# Altium PCB Instrumental Amplifier-2.PcbDoc
Units mm, origin at the board's own origin, x right, y up, seen from the top; angles counter-clockwise.
Board outline 152.4 x 101.6 mm, 2 copper layers (Top Layer, Bottom Layer); 11 components, 11 nets, 34 pads, 13 vias.
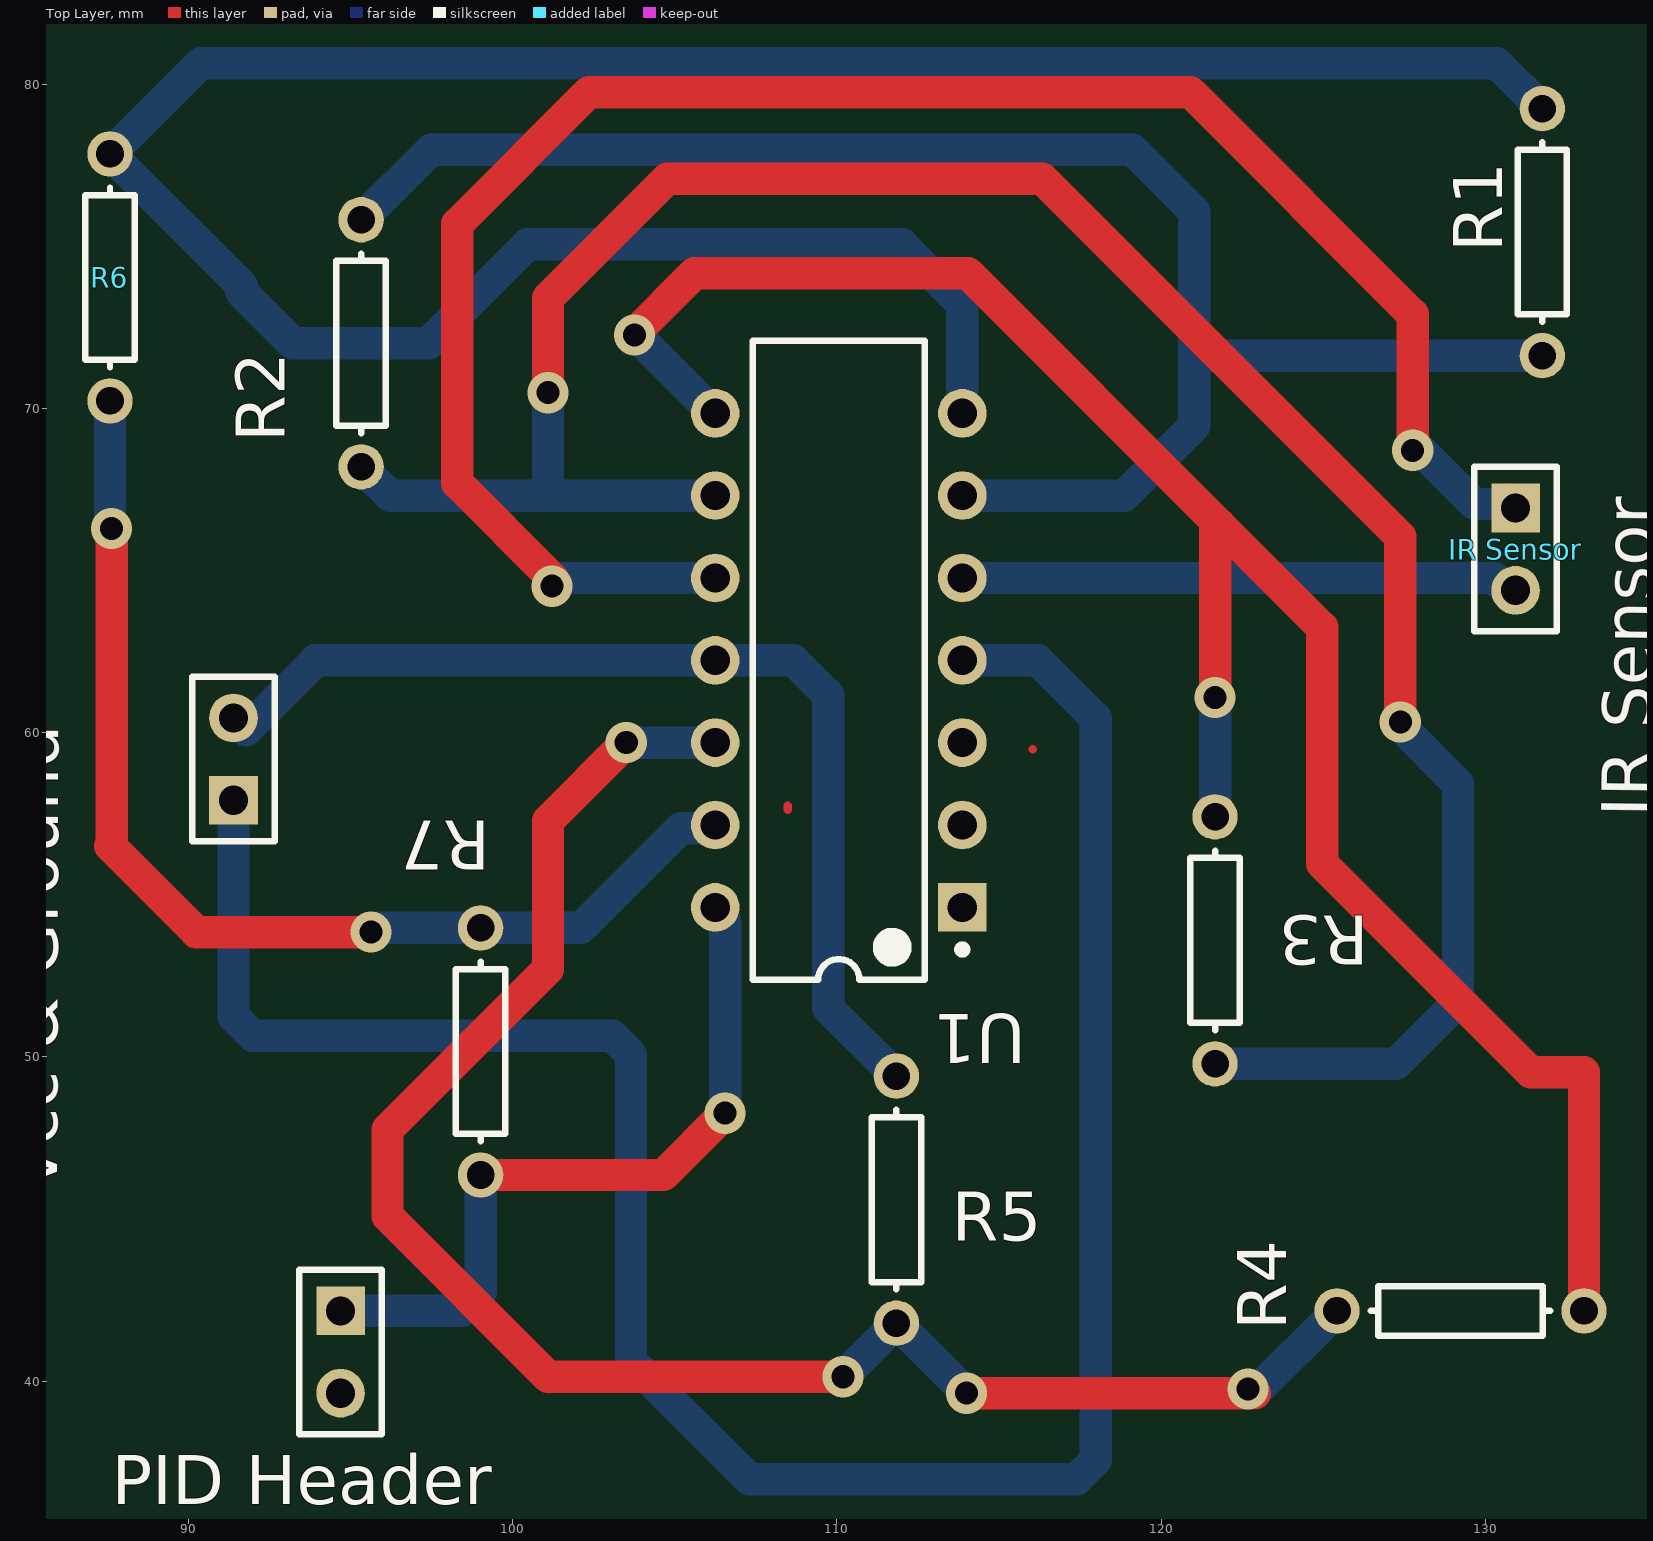
[diagram p0: Top Layer view]
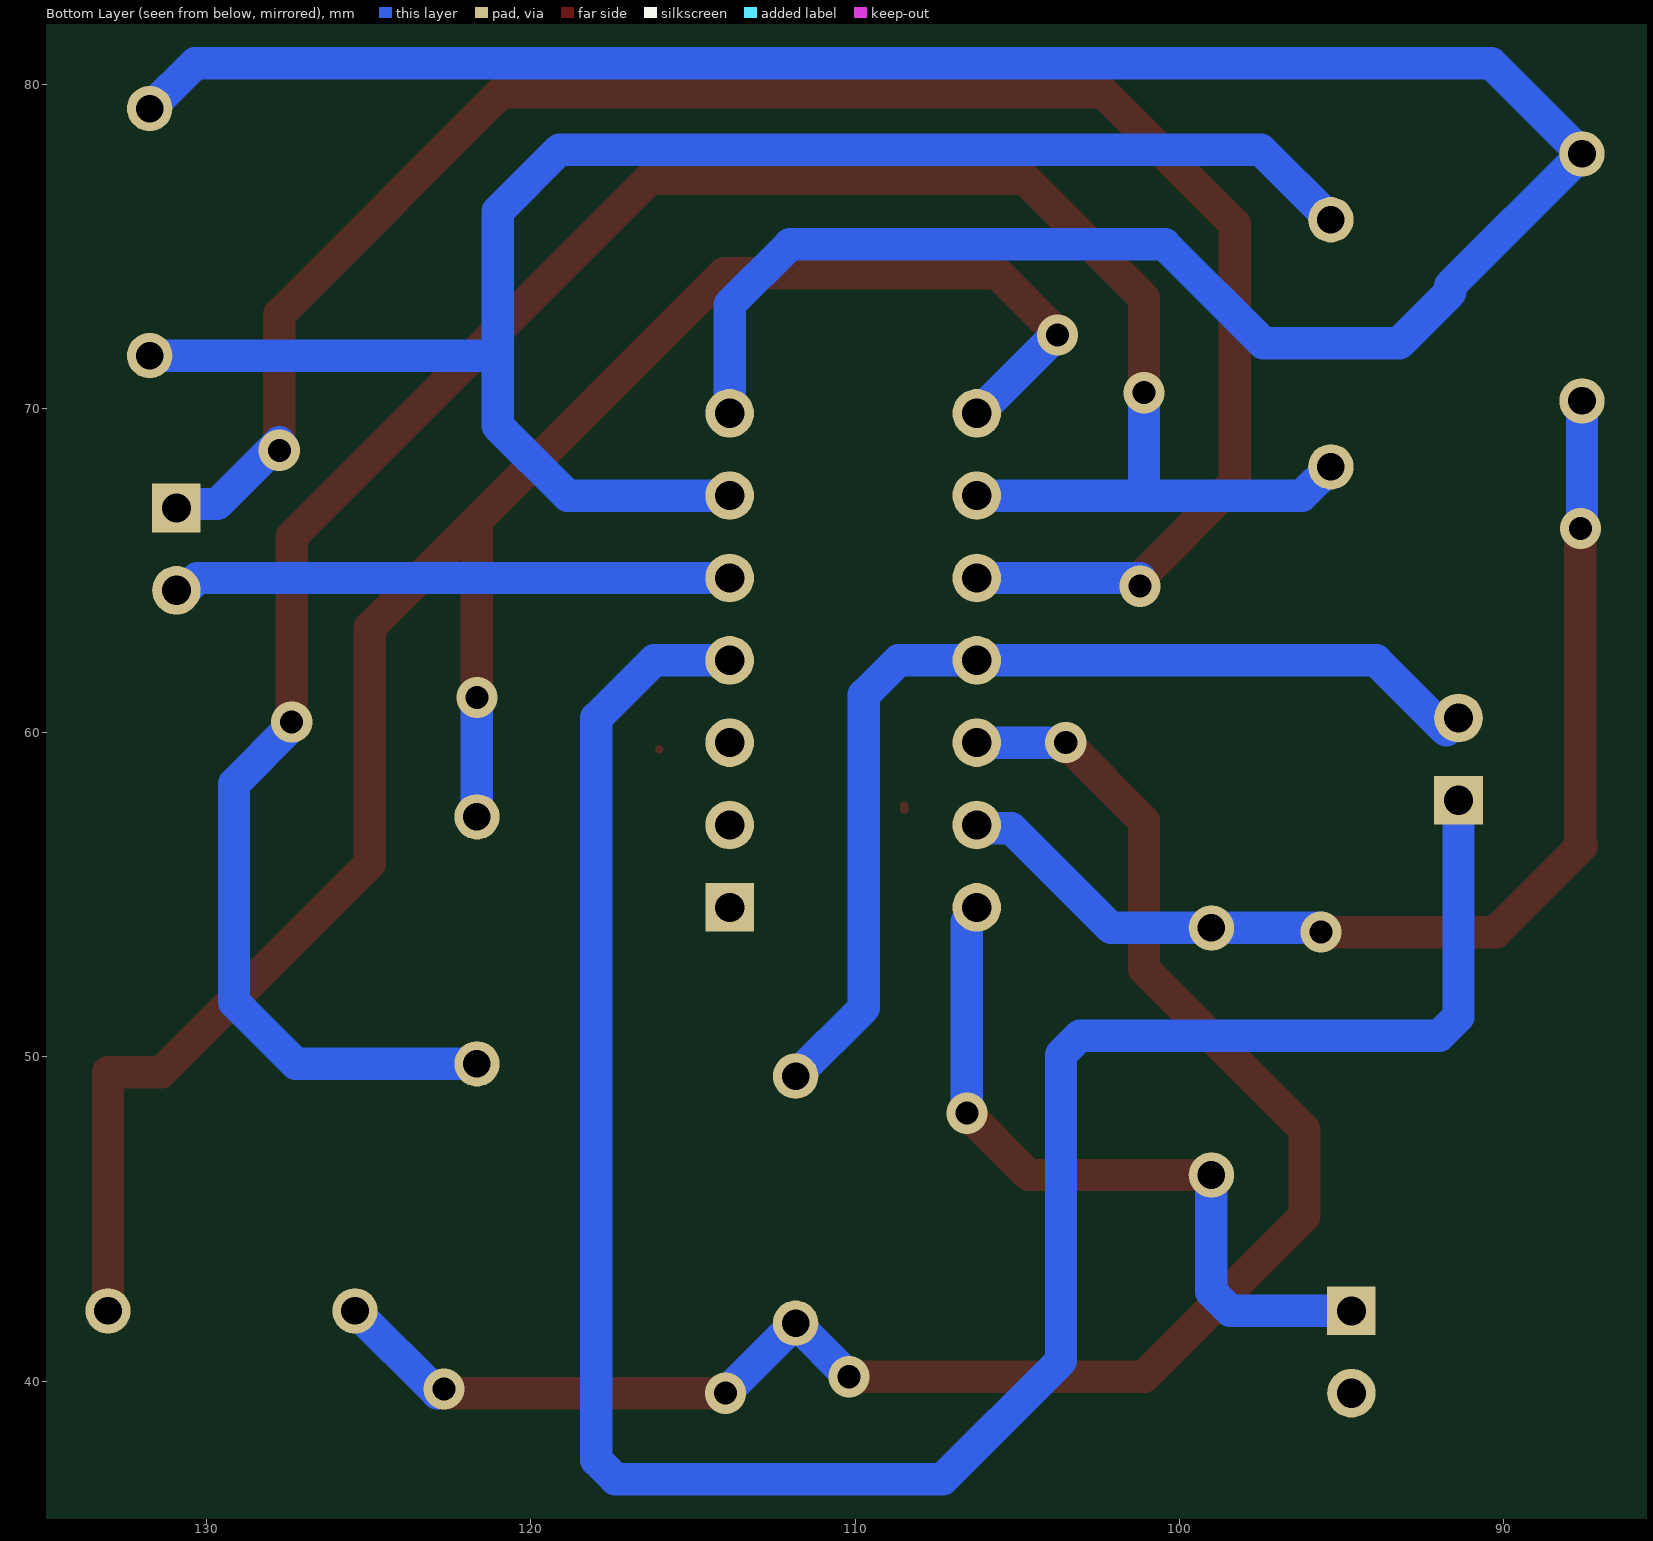
[diagram p1: Bottom Layer view, seen from below]

## Layer stack, top to bottom
Top Solder: solder mask 0.0102, Solder Resist, Dk 3.5
Top Layer: signal copper 0.0356
Dielectric 1: dielectric 0.32, FR-4, Dk 4.8
Bottom Layer: signal copper 0.0356
Bottom Solder: solder mask 0.0102, Solder Resist, Dk 3.5

## Board outline
25.4,25.4 177.8,25.4 177.8,127 25.4,127

## Design rules (kind name [scope] priority, off if disabled: settings)
Clearance [All] p1: gap=0.254 ignorepadtopadclearanceinfootprint=FALSE except(0: Arc-Hole Track-Hole SMDPad-Hole THPad-Hole Via-Hole Fill-Hole Poly-Hole Region-Hole Text-Hole)
PolygonConnect [All] p1: connectstyle=Relief reliefconductorwidth=0.254 reliefentries=4 polygonreliefangle="90 Angle" airgapwidth=0.254
RoomDefinition "Instrumental amplifier" [InComponentClass('Instrumental amplifier')] p1: confinementstyle=ConfineIn formatcopy=TRUE lockcomponents=FALSE outline 80.186,34.925 136.193,34.925 136.193,82.227 80.186,82.227
RoutingVias [All] p1: holewidth=0.711 width=1.27 viastyle="Through Hole" minholewidth=0.711 minwidth=1.27 maxholewidth=0.711 maxwidth=1.27
SolderMaskExpansion [All] p1: expansion=0.102 istentingtop=FALSE
Width [All] p1: maxlimit=1.5 minlimit=0.5 preferedwidth=1
30 further rules are at their usual default settings.

## Components (designator, comment, footprint, x,y, rotation, side; value= is the part's Value field where it differs from the comment)
"IR Sensor" "Header 2" HDR1X2 130.937,66.929 r270 top (schematic designator "IR Sensors")
"PID Header" "Header 2" HDR1X2 94.693,42.164 r270 top
R1 "Res1" AXIAL-0.3 131.759,75.438 r90 top value=1K
R2 "Res1" AXIAL-0.3 95.328,72.009 r90 top value=1K
R3 "Res1" AXIAL-0.3 121.666,53.594 r270 top value=1K
R4 "Res1" AXIAL-0.3 129.237,42.164 r180 top value=1K
R5 "Res1" AXIAL-0.3 111.838,45.593 r90 top value=1K
R6 "Res1" AXIAL-0.3 87.581,74.041 r270 top value=1K
R7 "Res1" AXIAL-0.3 99.011,50.165 r270 top value=1K
U1 "LM324N" N0014A 110.06,62.23 r180 top
"Vcc & Ground" "Header 2" HDR1X2 91.391,57.912 r90 top

## Footprints (in the part's own frame and the unit in brackets; to place one, negate y for a bottom-side part, rotate by r counter-clockwise, add the part's x,y. Pads: shape width x height; smd on the part's side, far side on the other; paste and mask are expansions set on the pad)
AXIAL-0.3 [mm] "Axial Device, Thru-Hole; 2 Leads; 0.3 in Pin Spacing"
  round 1.4 hole 0.85: 1(-3.81,0) 2(3.81,0)
  silkscreen extent -2.77,-0.76 2.77,0.76
HDR1X2 [mm] "Connector; Header; 2 Position"
  rect 1.5x1.5 hole 0.9: 1(0,0)
  round 1.5 hole 0.9: 2(2.54,0)
  silkscreen extent -1.27,-1.27 3.81,1.27
N0014A [mm] "DIP, 14-Leads, Body 19.7x6.6mm, Pitch 2.54mm"
  rect 1.5x1.5 hole 0.9: 1(-3.81,7.62)
  round 1.5 hole 0.9: 2(-3.81,5.08) 3(-3.81,2.54) 4(-3.81,0) 5(-3.81,-2.54) 6(-3.81,-5.08) 7(-3.81,-7.62) 8(3.81,-7.62) 9(3.81,-5.08) 10(3.81,-2.54) 11(3.81,0) 12(3.81,2.54) 13(3.81,5.08) 14(3.81,7.62)
  silkscreen extent -3.94,-9.85 2.65,9.85, body extent -3.95,-9.85 3.95,9.85, height 5.08

## Part data
"IR Sensor" "PID Header" "Vcc & Ground": "Header, 2-Pin", LatestRevisionDate=17-Jul-2002, LatestRevisionNote="Re-released for DXP Platform.", Publisher="Altium Limited"
R1 R2 R3 R4 R5 R6 R7: "Resistor", LatestRevisionDate=17-Jul-2002, LatestRevisionNote="Re-released for DXP Platform.", PackageDescription="Axial Device, Thru-Hole; 2 Leads; 0.3 in Pin Spacing", PackageReference=AXIAL-0.3, Published=8-Jun-2000, Publisher="Altium Limited"
U1: library part CMP-0055-00082-3, "Low Power Quad Operational Amplifier, 14-pin MDIP", Manufacturer="Texas Instruments", Package Reference=N0014A, PackageTopMarking=NSUZXYYTTE#*LM324N, PowerWise=N, Code_JEDEC=MS-001-AA, ComponentLink1Description="Datasheet URL", ComponentLink1URL=http://www.ti.com/general/docs/lit/getliterature.tsp?genericPartNumber=LM324&fileType=pdf, CompType=Amplifiers, PackageDescription="MDIP, .750 x .250 x.130in, 14 Lead, .100in Pitch", PinCount=14, RoHS=N

## Via types
v1: diameter 1.27, hole 0.711, Top Layer to Bottom Layer, 13 vias

## Nets (pads, with @x,y where several pads share a name; then routed paths per layer and width w, separated by ;. In a path a pad name is that pad's centre, name@x,y a point inside that pad or via, vN(x,y) a via of type N, cw(c..) or ccw(c..) an arc to the next point about the centre after c; other vN are vias at no path point)
"NetIR Sensors_1": "IR Sensor.1" U1.10 | length 59.2
  Top Layer w1: v1@101.221,64.77 98.298,67.693 98.298,75.692 102.362,79.756 120.904,79.756 127.762,72.898 v1@127.762,68.961 ; 130.687,67.179 130.937,66.929
  Bottom Layer w1: v1@101.221,64.77 U1.10 ; v1@127.762,68.961 129.671,67.052 130.687,67.052
  other v1: 101.219,64.516 127.762,68.707
"NetIR Sensors_2": "IR Sensor.2" U1.5 | length 17.3
  Bottom Layer w1: U1.5 130.294,64.77 130.802,64.262 130.937,64.262
"NetPID Header_1": "PID Header.1" R7.2 U1.14 | length 23
  Top Layer w1: R7.2 104.648,46.355 v1(106.553,48.26) ; U1.14@106.25,54.475 U1.14
  Bottom Layer w1: 94.693,42.164 98.425,42.164 99.011,42.75 R7.2 ; U1.14@106.25,54.475 106.553,54.171 v1(106.553,48.26)
NetR1_1: R1.1 R2.2 U1.6 | length 52.8
  Bottom Layer w1: R2.2 97.493,77.984 119.12,77.984 121.025,76.079 121.025,71.628 ; U1.6 118.872,67.31 121.025,69.463 121.025,71.628 ; R1.1 121.025,71.628
NetR1_2: R1.2 R6.1 U1.7 | length 80.1
  Bottom Layer w1: U1.7 113.87,73.201 112.014,75.057 100.457,75.057 97.409,72.009 93.218,72.009 91.645,73.582 91.645,73.787 R6.1 90.375,80.645 130.362,80.645 R1.2
NetR2_1: R2.1 R3.2 U1.9 | length 73
  Top Layer w1: v1(101.092,70.485) 101.092,73.406 104.775,77.089 116.332,77.089 127.381,66.04 v1(127.381,60.325) ; U1.9 U1.9@106.345,67.406
  Bottom Layer w1: R2.1 96.217,67.31 101.092,67.31 ; v1(101.092,70.485) 101.092,67.31 ; U1.9 101.092,67.31 ; R3.2@121.92,49.784 127.254,49.784 129.159,51.689 129.159,58.42 127.381,60.198 v1(127.381,60.325)
NetR3_1: R3.1 R4.1 U1.8 | length 64.5
  Top Layer w1: v1(103.759,72.263) 103.759,72.317 105.61,74.168 114.046,74.168 121.793,66.421 ; v1(121.666,61.087) 121.666,66.294 121.793,66.421 ; R4.1 133.047,49.53 131.398,49.53 124.968,55.96 124.968,63.246 121.793,66.421
  Bottom Layer w1: v1(103.759,72.263) 103.798,72.263 106.211,69.85 U1.8 ; R3.1 v1(121.666,61.087)
NetR4_2: R4.2 R5.1 U1.12 | length 54.4
  Top Layer w1: v1(103.505,59.69) 101.092,57.277 101.092,52.703 96.141,47.752 96.141,45.083 101.092,40.132 v1(110.187,40.132) ; v1(113.997,39.624) v1@122.887,39.624
  Bottom Layer w1: v1(103.505,59.69) U1.12 ; v1(110.187,40.132) R5.1 v1(113.997,39.624) ; v1@122.887,39.624 R4.2
  other v1: 122.682,39.751
NetR5_2: "Vcc & Ground.2" R5.2 U1.11 | length 31.9
  Bottom Layer w1: 91.772,60.071 93.931,62.23 U1.11 108.663,62.23 109.73,61.163 109.73,51.511 R5.2
NetR6_2: R6.2 R7.1 U1.13 | length 34.8
  Top Layer w1: v1(87.63,66.294) 87.63,56.564 87.581,56.515 90.248,53.848 v1(95.631,53.848)
  Bottom Layer w1: R6.2 87.581,66.343 v1(87.63,66.294) ; v1@95.631,53.975 R7.1 102.108,53.975 105.187,57.054 106.154,57.054 U1.13
NetU1_4: "Vcc & Ground.1" U1.4 | length 72.7
  Bottom Layer w1: 91.391,57.912 91.391,51.24 91.977,50.654 103.065,50.654 103.651,50.068 103.651,40.621 107.298,36.974 117.397,36.974 117.983,37.56 117.983,60.452 116.205,62.23 U1.4
pads on no net: "PID Header.2" U1.1 U1.2 U1.3
copper on no net: | length 0.2
  Top Layer w0.254: 108.485,57.623 108.485,57.646 108.485,57.752 ; 113.944,59.489 113.974,59.459

## Dimensions
73.406,102.362 to 129.667,100.584 on Top Layer